# EAGLE board dolly (EAGLE 9.1.0)
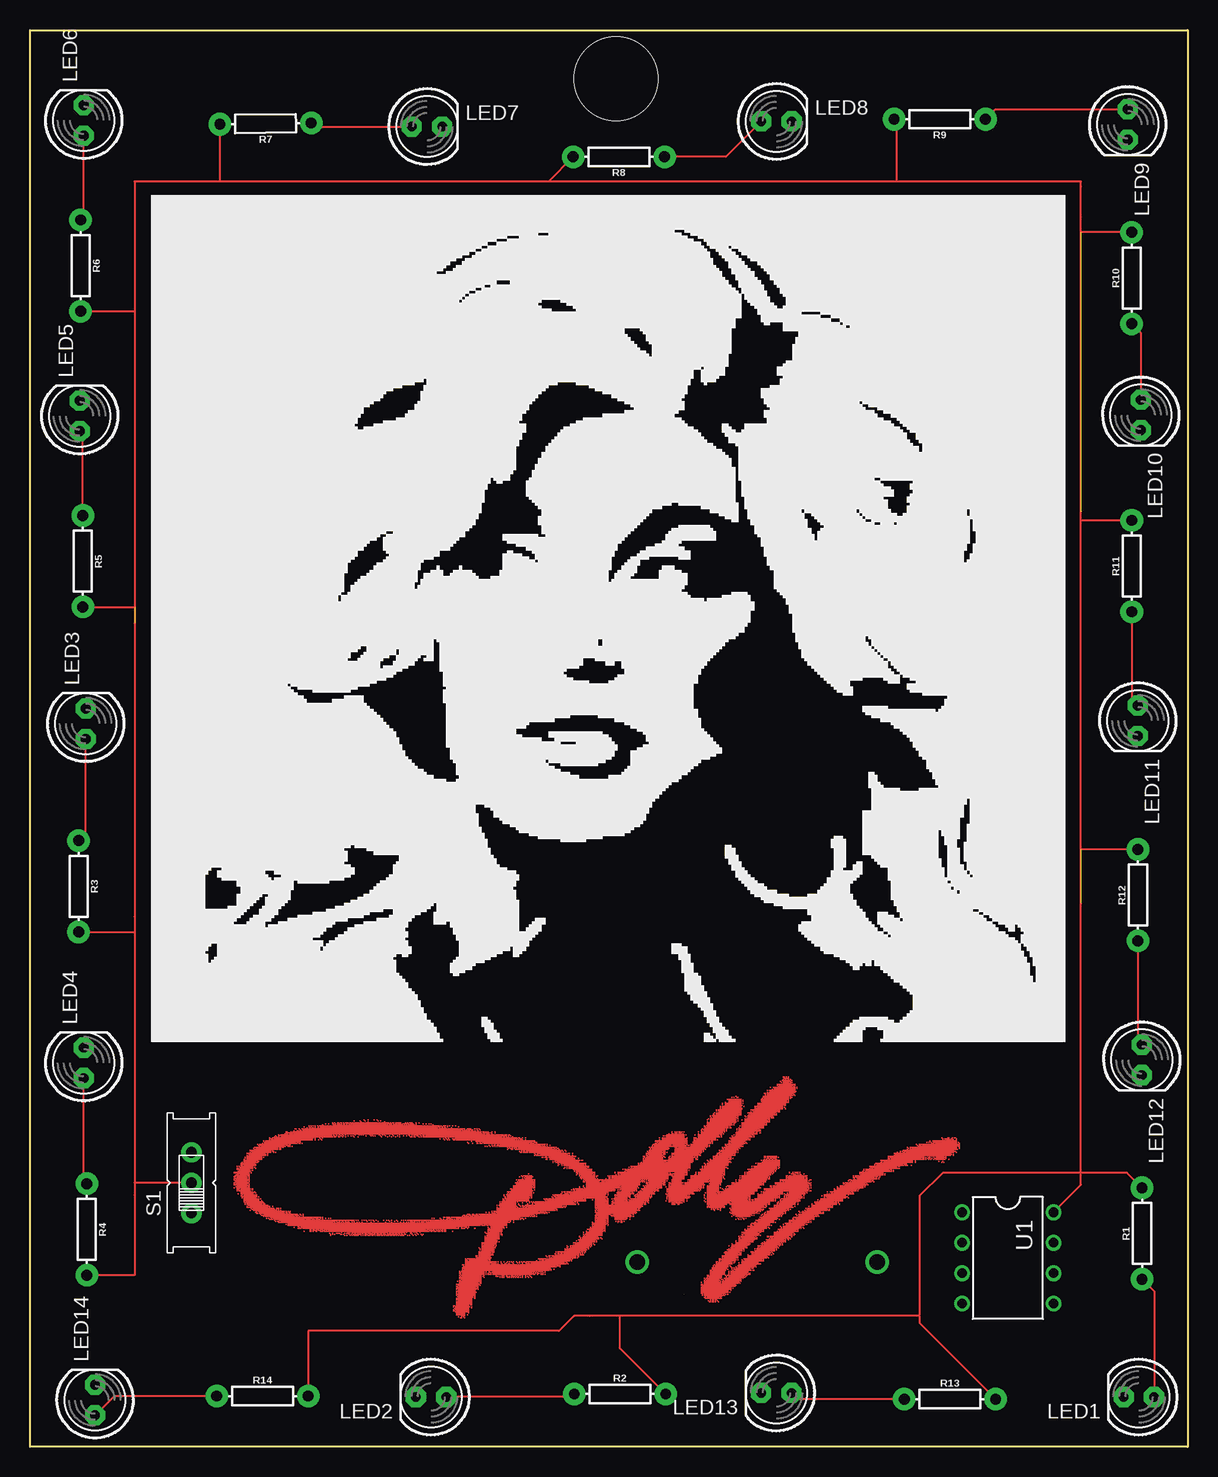
[diagram p0: board, top side]
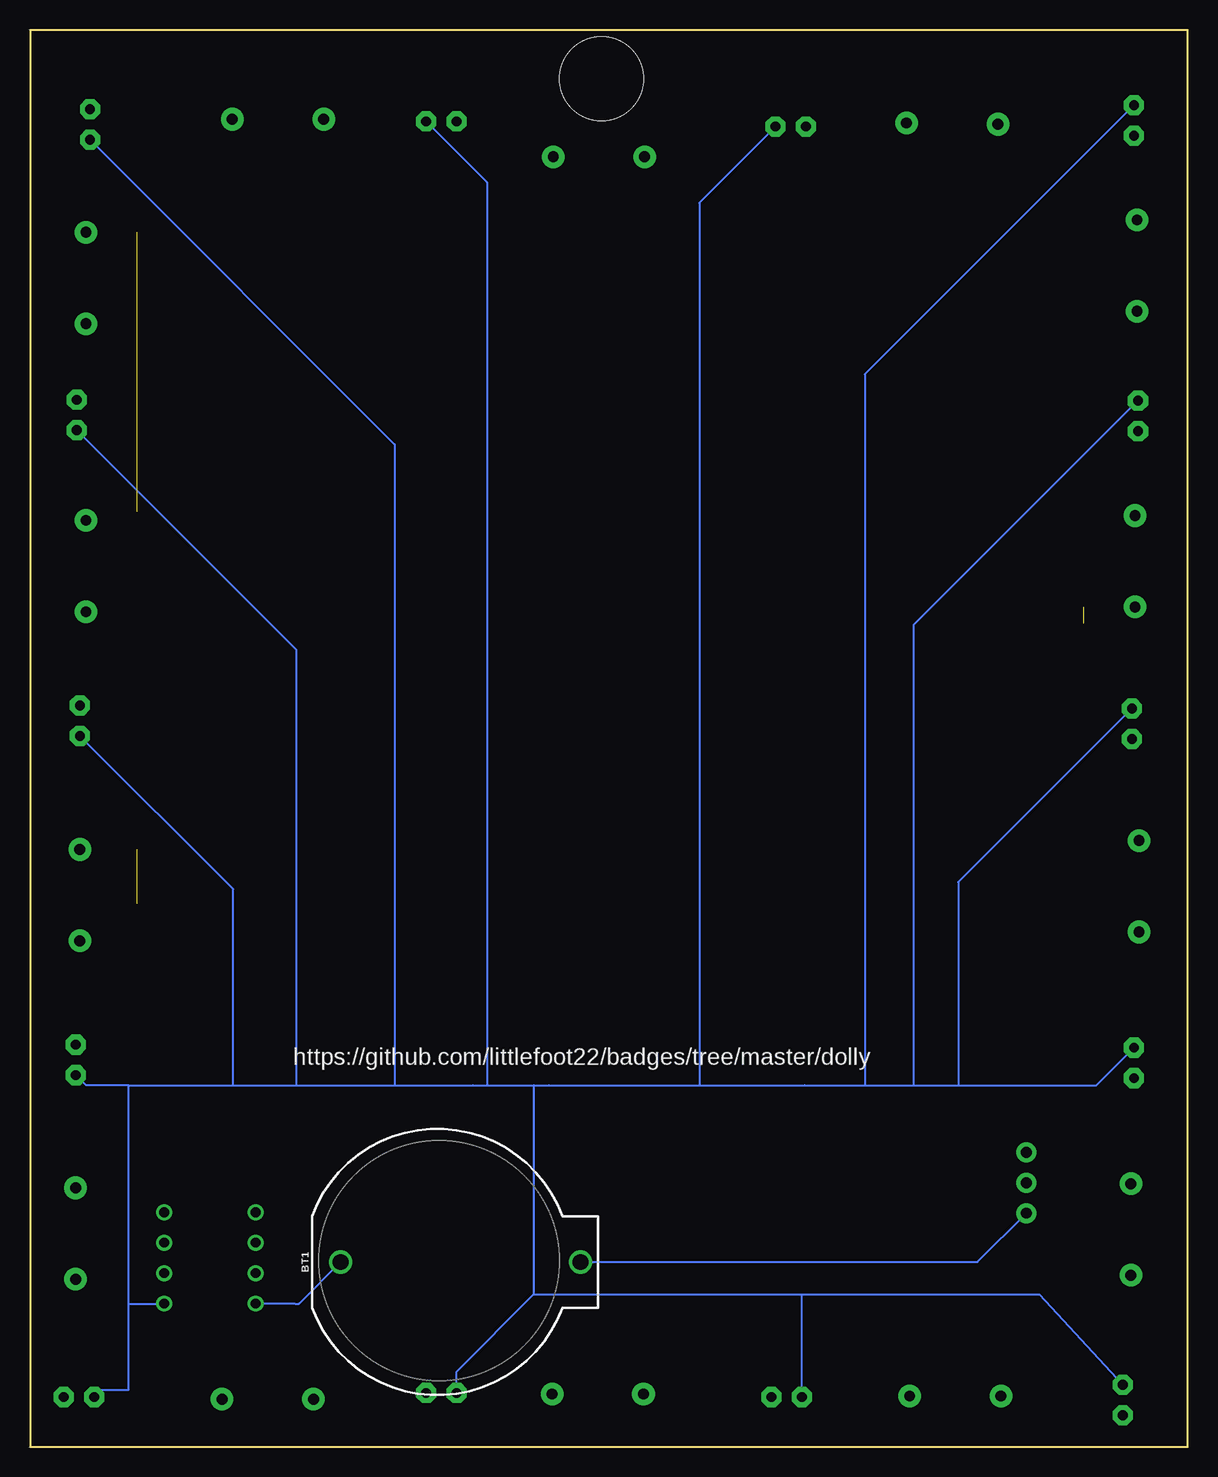
[diagram p1: board, bottom side, seen from below]

Size 96.52 x 118.11 mm. Coordinates in mm from the lower left corner, seen from the top.
Outline: 0,118.11 96.52,118.11 96.52,0 0,0 0,118.11
Copper layers (1*16): Top 0.035mm / dielectric 1.5mm / Bottom 0.035mm
Design rules "default": minimum track width 6mil, minimum drill 0.35mm, track to track 6mil, track to pad 6mil, pad to pad 6mil, via to via 6mil, smd to smd 6mil, copper to edge 40mil, drill to drill 6mil, minimum pad ring 10mil, minimum via ring 8mil, stop-mask expansion 4mil, vias tented up to drill 0mil, thermal gap 10mil
Holes 6.99 mm at 48.86,114.04

## Footprints (pad centres in the part's own frame; a part is rotated, then mirrored left to right if it is on the bottom)
BATTCOM_20MM_PTH = drill 1.3: 1 11.85,0; 2 -8.15,0
LED5MM = drill 0.813 pad 1.676 octagon: A -1.27,0; K 1.27,0
AXIAL-0.3 = drill 0.9 pad 1.88: P$1 -3.81,0; P$2 3.81,0
EG1218 = drill 0.9 pad 1.676: O -2.54,0; P 0,0; S 2.54,0
PDIP08_300MIL = drill 0.813: 1 -3.81,-3.81; 2 -1.27,-3.81; 3 1.27,-3.81; 4 3.81,-3.81; 5 3.81,3.81; 6 1.27,3.81; 7 -1.27,3.81; 8 -3.81,3.81

## Placement (x,y rotation side)
BT1  [BATTCOM_20MM_PTH]  62.48,15.41 0 bottom
LED1  [LED5MM]  92.44,4.15 180 top
LED2  [LED5MM]  33.44,4.15 180 top
LED3  [LED5MM]  4.65,60.28 90 top
LED4  [LED5MM]  4.48,32.01 90 top
LED5  [LED5MM]  4.15,85.93 90 top
LED6  [LED5MM]  4.48,110.57 90 top
LED7  [LED5MM]  33.1,110.06 0 top
LED8  [LED5MM]  62.23,110.49 0 top
LED9  [LED5MM]  91.51,110.23 270 top
LED10  [LED5MM]  92.61,86.02 270 top
LED11  [LED5MM]  92.36,60.54 270 top
LED12  [LED5MM]  92.7,32.26 270 top
LED13  [LED5MM]  62.22,4.49 180 top
LED14  [LED5MM]  5.42,3.9 90 top
R1  10k  [AXIAL-0.3]  92.71,17.78 90 top
R2  10k  [AXIAL-0.3]  49.18,4.4 0 top
R3  10k  [AXIAL-0.3]  4.06,46.73 270 top
R4  10k  [AXIAL-0.3]  4.74,18.12 270 top
R5  10k  [AXIAL-0.3]  4.4,73.82 270 top
R6  10k  [AXIAL-0.3]  4.22,98.47 270 top
R7  10k  [AXIAL-0.3]  19.64,110.31 180.8 top
R8  10k  [AXIAL-0.3]  49.09,107.54 180 top
R9  10k  [AXIAL-0.3]  75.85,110.67 180 top
R10  10k  [AXIAL-0.3]  91.85,97.44 90 top
R11  10k  [AXIAL-0.3]  91.85,73.42 90 top
R12  10k  [AXIAL-0.3]  92.36,45.99 90 top
R13  10k  [AXIAL-0.3]  76.7,3.97 0 top
R14  10k  [AXIAL-0.3]  19.38,4.23 0 top
S1  [EG1218]  13.46,22.02 90 top
U1  ATTINY85-20P  [PDIP08_300MIL]  81.52,15.75 270 top

## Library data of the parts
BT1 = SparkFun-Batteries; PROD_ID: BATT-09031; SF_SKU: PRT-00783
LED1-LED14 S1 = adafruit
R1-R14 = SparkFun-Resistors; PROD_ID: RES-12183
U1 = _hhn_attiny25_45_85

## Nets
N$1: LED1.A R1.P$1
N$2: BT1.1 S1.O
N$3: LED3.A R3.P$1
N$4: LED1.K LED2.K LED3.K LED4.K LED5.K LED6.K LED7.K LED8.K LED9.K LED10.K LED11.K LED12.K LED13.K LED14.K U1.5
N$5: BT1.2 U1.4
N$6: R1.P$2 R2.P$2 R3.P$2 R4.P$2 R5.P$2 R6.P$2 R7.P$2 R8.P$2 R9.P$2 R10.P$2 R11.P$2 R12.P$2 R13.P$2 R14.P$2 S1.P U1.8
N$7: LED4.A R4.P$1
N$8: LED5.A R5.P$1
N$9: LED6.A R6.P$1
N$10: LED7.A R7.P$1
N$11: LED8.A R8.P$1
N$12: LED9.A R9.P$1
N$13: LED10.A R10.P$1
N$14: LED11.A R11.P$1
N$15: LED12.A R12.P$1
N$16: LED13.A R13.P$1
N$17: LED14.A R14.P$1
N$18: LED2.A R2.P$1

## Tracks (layer width: path | path; a pad name or v marks a point on that pad's centre or on a via)
N$1
  Top 0.152: R1.P$1 93.71,12.97 LED1.A
N$2
  Bottom 0.152: BT1.1 17.52,15.41 S1.O
N$3
  Top 0.152: R3.P$1 4.65,50.54 LED3.A
N$4  (1 unrouted)
  Bottom 0.152: 88.3,30.14 79.58,30.14 | 79.58,30.14 74.33,30.14 | 74.33,30.14 66.12,30.14 | 66.12,30.14 59.6,30.14 58.42,30.14 | 58.42,30.14 54.52,30.14 | 26.92,30.14 31.92,30.14 40.72,30.14 | 26.92,30.14 22.86,30.14 | 22.86,30.14 19.13,30.14 | 19.13,30.14 7.62,30.14 LED4.K | 88.3,30.14 91.85,30.14 LED12.K | 79.58,30.14 79.58,46.48 LED11.K | LED10.K 74.33,66.46 74.33,30.14 | LED9.K 66.12,83.57 66.12,30.14 | 40.72,30.14 40.72,103.71 LED7.K | LED6.K 26.92,89.4 26.92,30.14 | LED5.K 22.86,68.49 22.86,30.14 | LED3.K 19.13,47.07 19.13,30.14 | LED1.K 90.58,4.75 88.3,4.75 88.3,12.37 | 54.52,30.14 54.52,12.7 32.17,12.7 | LED14.K 12.37,12.7 24.72,12.7 25.82,12.7 29.63,12.7 32.17,12.7 | LED13.K 60.95,6.27 54.52,12.7 | 54.52,30.14 53.25,30.14 40.72,30.14 | LED8.K 58.42,105.41 58.42,30.14 | U1.5 88.3,11.94 88.3,13.64 88.3,30.14 | LED2.K 32.17,12.7
N$5
  Bottom 0.152: U1.4 74.44,11.94 74.1,11.94 BT1.2
N$6  (3 unrouted)
  Top 0.152: 87.62,22.86 87.62,49.8 R12.P$2 | 87.62,45.29 87.62,77.97 | 8.72,94.66 8.72,68.66 | 8.72,42.92 8.72,44.19 8.72,70.01 R5.P$2 | 8.72,21 8.72,22.02 S1.P | R4.P$2 8.72,14.3 8.72,21 | 74.16,10.92 74.16,10.33 R13.P$2 | 72.21,105.48 72.21,110.5 R9.P$2 | R6.P$2 8.72,94.66 | 87.62,22.86 87.62,21.85 U1.8 | 87.62,22.86 85.08,22.86 76.11,22.86 74.16,20.91 74.16,11.01 | 87.62,101.25 87.63,101.25 R10.P$2 | 8.72,94.66 8.72,105.48 12.02,105.48 14.56,105.48 15.83,105.48 | R7.P$2 15.83,108.03 15.83,105.48 | R11.P$2 87.62,77.23 87.62,101.25 | 74.16,10.92 46.65,10.92 46.64,10.93 49.18,10.93 49.18,8.21 R2.P$2 | R3.P$2 8.72,42.92 | R1.P$2 91.44,22.86 87.62,22.86 | 87.62,101.25 87.62,102.52 87.62,105.06 87.62,105.48 74.75,105.48 73.48,105.48 72.21,105.48 | R14.P$2 23.19,9.66 44.1,9.66 45.37,10.92 74.16,10.92 | 15.83,105.48 43.23,105.48 R8.P$2 | 72.21,105.48 42.33,105.48 | 8.72,42.92 8.72,21
N$7
  Top 0.152: R4.P$1 4.48,21.93 LED4.A
N$8
  Top 0.152: R5.P$1 4.4,84.41 LED5.A
N$9
  Top 0.152: R6.P$1 4.49,102.54 LED6.A
N$10
  Top 0.152: LED7.A 23.75,110.06 R7.P$1
N$11
  Top 0.152: LED8.A 58.01,107.54 R8.P$1
N$12
  Top 0.152: LED9.A 80.49,111.5 R9.P$1
N$13
  Top 0.152: R10.P$1 92.61,92.86 LED10.A
N$14
  Top 0.152: R11.P$1 91.85,62.31 LED11.A
N$15
  Top 0.152: R12.P$1 92.36,33.53 LED12.A
N$16
  Top 0.152: R13.P$1 64.01,3.98 LED13.A
N$17
  Top 0.152: LED14.A 7.02,4.23 R14.P$1
N$18
  Top 0.152: LED2.A 45.12,4.15 R2.P$1
(copper drawn outside any net)
  shapes: Top area x2884

## Text on the board
bPlace: https://github.com/littlefoot22/badges/tree/master/dolly